# Altium PCB puttingTheSexInRSX.PcbDoc
Units mm, origin at the board's own origin, x right, y up, seen from the top; angles counter-clockwise.
Board outline 28.5 x 57.5 mm, 2 copper layers (Top, Bottom); 6 components, 11 nets, 61 pads, 0 vias.
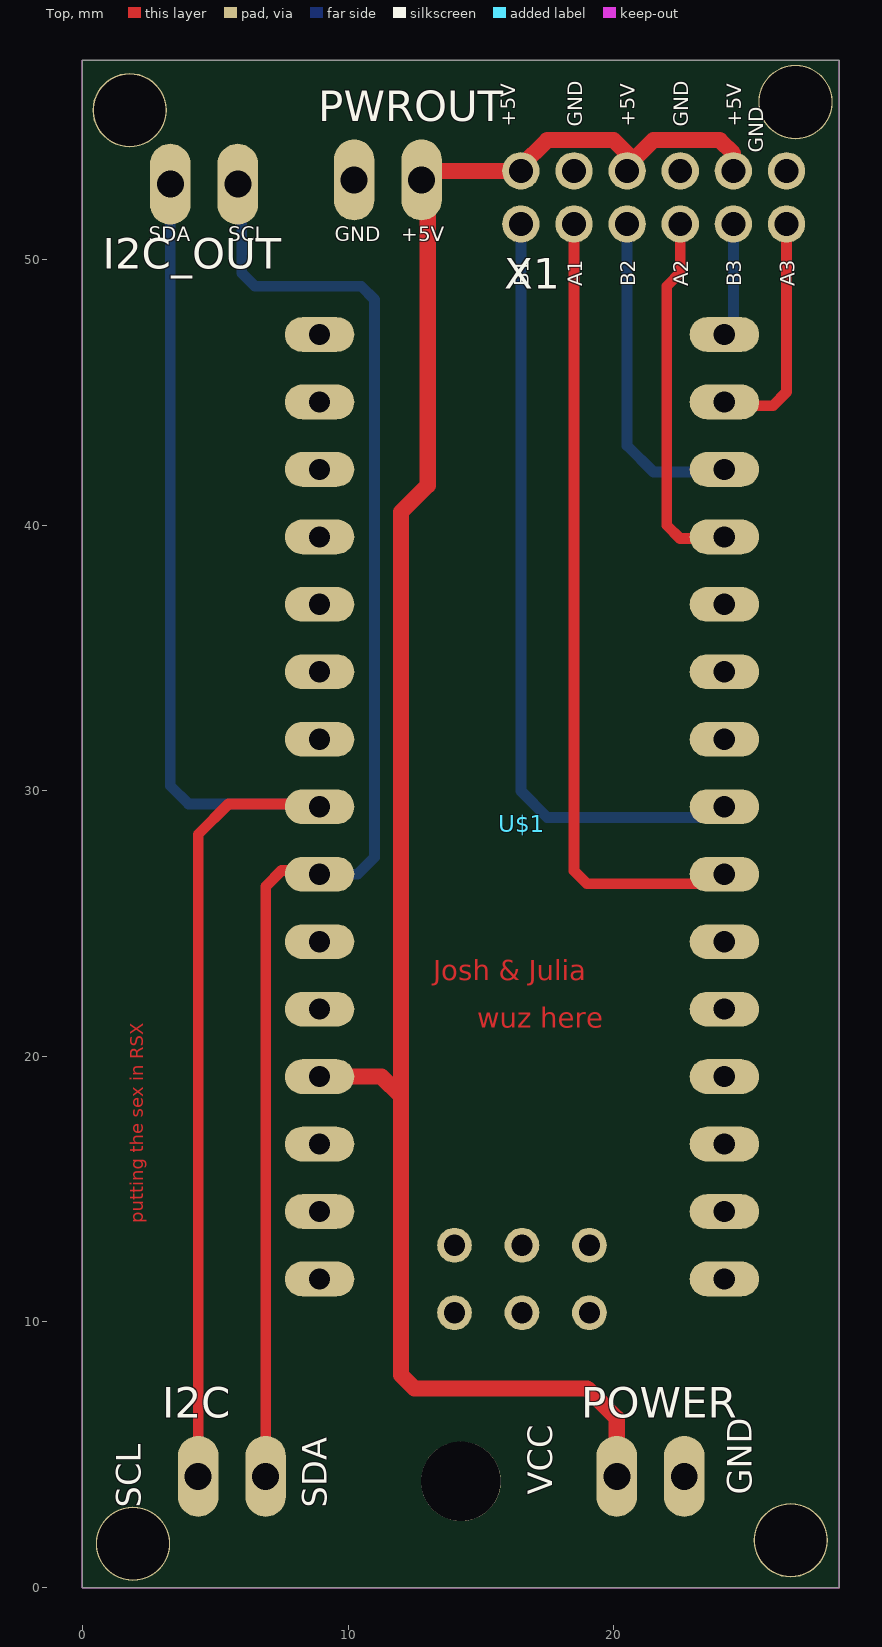
[diagram p0: Top view]
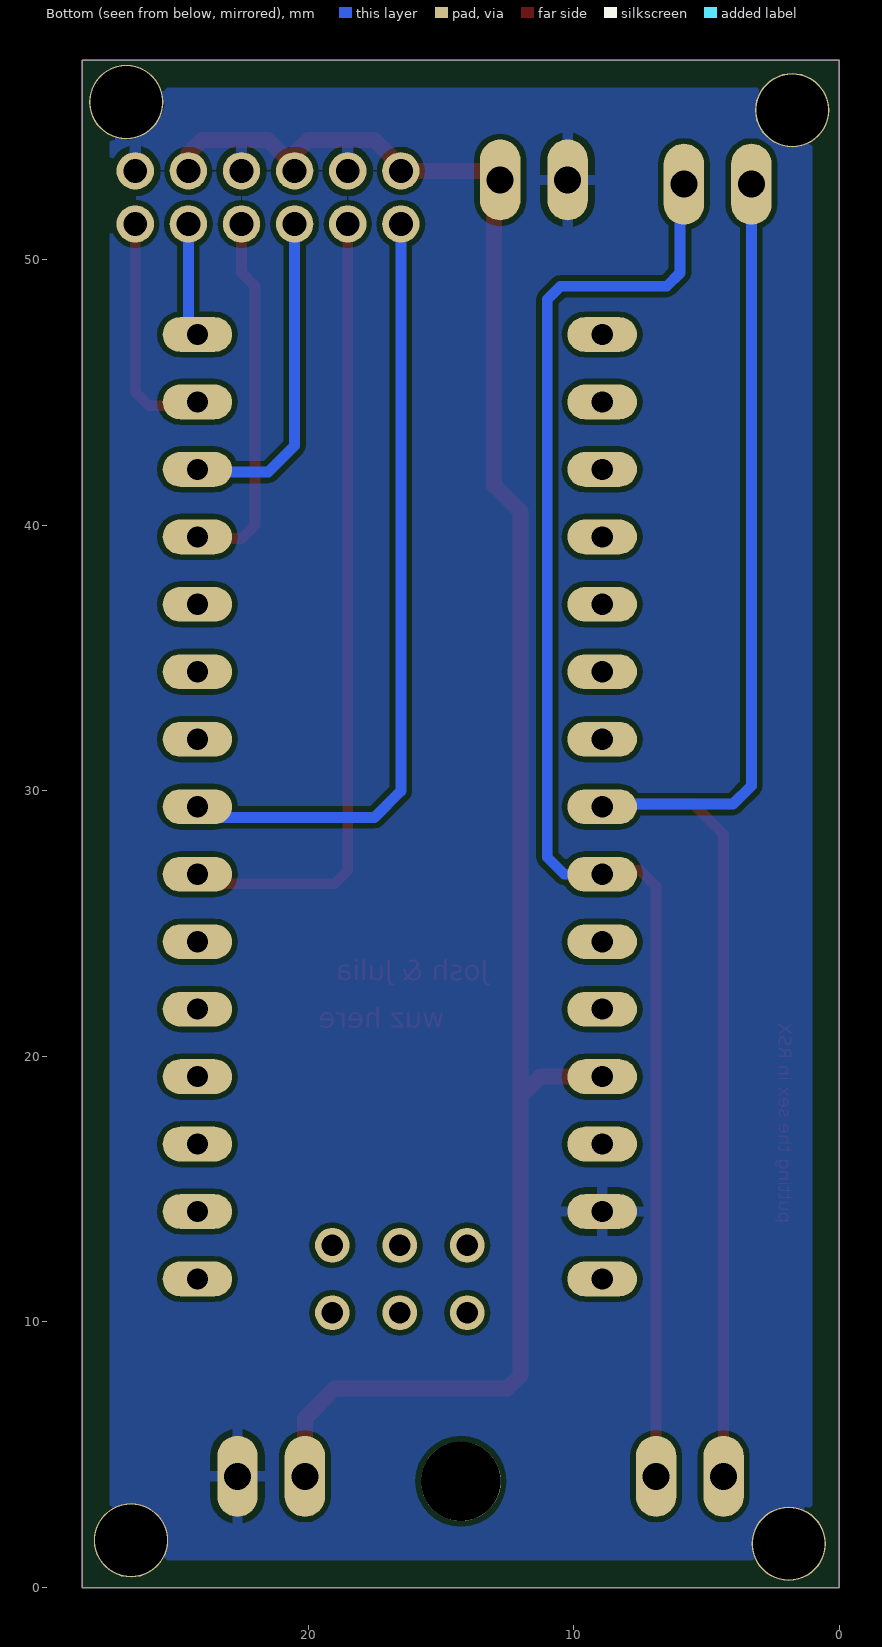
[diagram p1: Bottom view, seen from below]

## Layer stack, top to bottom
Top Solder: solder mask 0.0102, Solder Resist, Dk 3.5
Top: signal copper 0.035
Dielectric 1: dielectric 0.32, FR-4, Dk 4.8
Bottom: signal copper 0.035
Bottom Solder: solder mask 0.0102, Solder Resist, Dk 3.5

## Board outline
0,0 28.5,0 28.5,57.5 0,57.5

## Design rules (kind name [scope] priority, off if disabled: settings)
BoardOutlineClearance mdCopperDimension [All] p1: gap=0.254 ignorepadtopadclearanceinfootprint=FALSE except(0: Arc-SplitContinuation Track-SplitContinuation SMDPad-SplitContinuation THPad-SplitContinuation Via-SplitContinuation Fill-SplitContinuation Poly-SplitContinuation Region-SplitContinuation Text-SplitContinuation; 1.016: Poly-OutlineEdge Poly-CavityEdge Poly-CutoutEdge Poly-SplitBarrior)
Clearance "Clearance (Same Net)" [All] p1: gap=0.203 ignorepadtopadclearanceinfootprint=FALSE
Clearance [All] p2: gap=0.203 ignorepadtopadclearanceinfootprint=FALSE except(0: Arc-Poly Track-Poly SMDPad-Poly THPad-Poly Via-Poly Fill-Poly Poly-Poly Poly-Region Poly-Text; 1.016: Poly-Hole)
HoleSize [All] p1: absolutevalues=TRUE maxlimit=2540 minlimit=0.61 maxpercent=80.000 minpercent=20.000
HoleToHoleClearance mdDrill [All] p1: gap=0.203 allowstackedmicrovias=TRUE
PasteMaskExpansion mlMinCreamFrame [All] p1: expansion=0
PolygonConnect PolygonConnect_For_PolygonThermal_ON_Width160000_Gap100000 [InPolygonClass('PolygonThermal_ON_Width160000_Gap100000') vs Not IsVia] p1: connectstyle=Relief reliefconductorwidth=0.406 reliefentries=4 polygonreliefangle="90 Angle" airgapwidth=0.254
PolygonConnect ThermalVias [IsVia] p2: connectstyle=Direct reliefconductorwidth=0.254 reliefentries=4 polygonreliefangle="90 Angle" airgapwidth=0.254
PolygonConnect [All] p3: connectstyle=Relief reliefconductorwidth=0.254 reliefentries=4 polygonreliefangle="90 Angle" airgapwidth=0.254
RoutingVias [All] p1: holewidth=0.61 width=1.016 viastyle="Through Hole" minholewidth=0.61 minwidth=1.016 maxholewidth=2.54 maxwidth=2.54
SolderMaskExpansion mlMinStopFrame [All] p1: expansion=0.102 istentingtop=FALSE
Width [All] p1: maxlimit=254 minlimit=0.254 preferedwidth=0.254
27 further rules are at their usual default settings.

## Classes and differential pairs
polygon class PolygonThermal_ON_Width160000_Gap100000: Polygon_1_Net_GND
polygon class Isolate_0: Polygon_1_Net_GND

## Components (designator, comment, footprint, x,y, rotation, side; value= is the part's Value field where it differs from the comment)
I2C "" 1X02 5.63,4.19 r0 top
I2C_OUT "" 1X02 4.58,52.84 r0 top
POWER "" 1X02 21.39,4.19 r0 top
PWROUT "" 1X02 11.5,53 r0 top
U$1 "" NANO 19.09,20.51 r0 top
X1 "M_OUT" 87758-1216 21.51,52.34 r0 top

## Footprints (in the part's own frame and the unit in brackets; to place one, negate y for a bottom-side part, rotate by r counter-clockwise, add the part's x,y. Pads: shape width x height; smd on the part's side, far side on the other; paste and mask are expansions set on the pad)
1X02 [mil] "1X02"
  oval 60x120 / inner round 60 / far side oval 60x120 hole 40: 1(-50,0) 2(50,0)
  body extent -80,-30 80,30, height 150
87758-1216 [mm] "87758-1216"
  round 1.408 / inner round 1.524 / far side round 1.408 hole 0.9: 1(-5,-1) 2(-5,1) 3(-3,-1) 4(-3,1) 5(-1,-1) 6(-1,1) 7(1,-1) 8(1,1) 9(3,-1) 10(3,1) 11(5,-1) 12(5,1)
  body extent -5.77,-1.77 5.77,1.77, height 3.81
NANO [mil] "NANO"
  oval 103x51.5 / inner round 60 / far side oval 103x51.5 hole 31.5: 3.3V(-400,950) 5V(-400,-50) A0(-400,750) A1(-400,650) A2(-400,550) A3(-400,450) A4(-400,350) A5(-400,250) A6(-400,150) A7(-400,50) AREF(-400,850) D2(200,50) D3(200,150) D4(200,250) D5(200,350) D6(200,450) D7(200,550) D8(200,650) D9(200,750) D10(200,850) D11(200,950) D12(200,1050) D13(-400,1050) GND(-400,-250) GND1(200,-50) RAW(-400,-350) RST(-400,-150) RST1(200,-150) RX1(200,-250) TX0(200,-350)
  round 51.5 / inner round 60 / far side round 51.5 hole 31.5: ICSP1(-200,-400) ICSP2(-200,-300) ICSP3(-100,-400) ICSP4(-100,-300) ICSP5(0,-400) ICSP6(0,-300)
  body extent -430,-430 230,1080, height 50

## Part data
I2C I2C_OUT POWER PWROUT: library part 1X02, PackageName=1X02
U$1: library part NANO, PackageName=NANO
X1: library part 87758-1216, PackageName=87758-1216

## Free pads (board coordinates)
  round 2.8 hole 2.7: 7(26.67,1.778) 8(1.905,1.651) 9(26.848,55.931) 10(1.778,55.626)
  round 3 hole 3 unplated: MH1(14.25,4)

## Nets (pads, with @x,y where several pads share a name; then routed paths per layer and width w, separated by ;. In a path a pad name is that pad's centre, name@x,y a point inside that pad or via, vN(x,y) a via of type N, cw(c..) or ccw(c..) an arc to the next point about the centre after c; other vN are vias at no path point)
+5V: X1.2 X1.6 X1.10 | length 14.4
  Top w0.61: 13,53.34 X1.2 16.51,53.51 17.5,54.5 20,54.5 20.5,54 20.5,53.35 X1.6 20.51,53.51 21.5,54.5 24,54.5 24.5,54 24.5,53.35 X1.10
A1: U$1.D4 X1.3 | length 30.4
  Top w0.406: X1.3 18.51,26.99 19,26.5 23.81,26.5 U$1.D4
A2: U$1.D9 X1.7 | length 14
  Top w0.406: X1.7 22.51,49.51 22,49 22,40 22.5,39.5 24.11,39.5 U$1.D9
A3: U$1.D11 X1.11 | length 8.9
  Top w0.406: U$1.D11 24.31,44.5 26,44.5 26.51,45.01 X1.11
B1: U$1.D5 X1.1 | length 29.6
  Bottom w0.406: X1.1 16.51,29.99 17.5,29 23.77,29 U$1.D5
B2: U$1.D10 X1.5 | length 12.5
  Bottom w0.406: X1.5 20.51,42.99 21.5,42 24.07,42 U$1.D10
B3: U$1.D12 X1.9 | length 4.3
  Bottom w0.406: U$1.D12 24.51,47.52 X1.9
GND: POWER.2 PWROUT.1 U$1.GND X1.4 X1.8 X1.12
SCL: I2C.2 I2C_OUT.2 U$1.A5 | length 56.7
  Top w0.406: I2C.2 6.9,26.4 7.5,27 8.79,27 U$1.A5
  Bottom w0.406: I2C_OUT.2 6,52.69 6,49.5 6.5,49 10.5,49 11,48.5 11,27.5 10.36,26.86 U$1.A5
SDA: I2C.1 I2C_OUT.1 U$1.A4 | length 57.9
  Top w0.406: I2C.1 4.36,28.36 5.5,29.5 8.83,29.5 U$1.A4
  Bottom w0.406: I2C_OUT.1 3.31,30.19 4,29.5 8.83,29.5 U$1.A4
VIN: POWER.1 PWROUT.2 U$1.5V | length 59.5
  Top w0.61: U$1.5V 11.26,19.24 12,18.5 ; PWROUT.2@13,52.77 13,41.5 12,40.5 12,18.5 ; POWER.1 20.12,6.38 19,7.5 12.5,7.5 12,8 12,18.5
pads on no net: U$1.3.3V U$1.A0 U$1.A1 U$1.A2 U$1.A3 U$1.A6 U$1.A7 U$1.AREF U$1.D2 U$1.D3 U$1.D6 U$1.D7 U$1.D8 U$1.D13 U$1.GND1 U$1.ICSP1 U$1.ICSP2 U$1.ICSP3 U$1.ICSP4 U$1.ICSP5 U$1.ICSP6 U$1.RAW U$1.RST U$1.RST1 U$1.RX1 U$1.TX0

## Polygon pours and split planes (outlines as drawn)
GND on Bottom "Polygon_1_Net_GND" (solid, remove dead copper, pour order 0): 0,0 0,57.906 28.906,57.906 28.906,0

## Keep-outs
Keep-Out Layer:
  the board outline again, w0

## Other copper
Top:
  text "Josh & Julia" at 13.208,22.86 h0.75
  text "wuz here" at 14.859,21.082 h0.75
  text "putting the sex in RSX" at 2.286,13.716 h0.5 r90

## Silkscreen, mask and mechanical layers (free items; w line width, h text height)
Top Overlay:
  text "+5V" at 16.49,55 h0.94 r90
  text "GND" at 19,55 h0.94 r90
  text "+5V" at 20.989,55 h0.94 r90
  text "GND" at 23,55 h0.94 r90
  text "+5V" at 24.989,55 h0.94 r90
  text "GND" at 25.827,54.023 h0.94 r90
  text "+5V" at 12,50.511 h0.94
  text "SDA" at 2.5,50.5 h0.94
  text "SCL" at 5.5,50.5 h0.94
  text "GND" at 9.5,50.5 h0.94
  text "B1" at 17,49 h0.94 r90
  text "A1" at 19,49 h0.94 r90
  text "B2" at 21,49 h0.94 r90
  text "A2" at 23,49 h0.94 r90
  text "B3" at 25,49 h0.94 r90
  text "A3" at 27,49 h0.94 r90
  text "VCC" at 18,3.5 h1.57 r90
  text "GND" at 25.5,3.5 h1.57 r90
  text "SCL" at 2.5,3 h1.57 r90
  text "SDA" at 9.5,3 h1.57 r90
Dimension:
  the board outline again, w0
Unrouted:
  lines w0: 12.77,53 13,52.77

## Text inside footprints (layer, text, board x,y; h text height)
X1: Top Assembly "1" at 15.86,50.59 h0.26